# Altium PCB Cube_Connector.PcbDoc
Units mm, origin at the board's own origin, x right, y up, seen from the top; angles counter-clockwise.
Board outline 119.89 x 137.16 mm, 2 copper layers (Top Layer, Bottom Layer); 1 components, 90 nets, 60 pads, 4 vias.
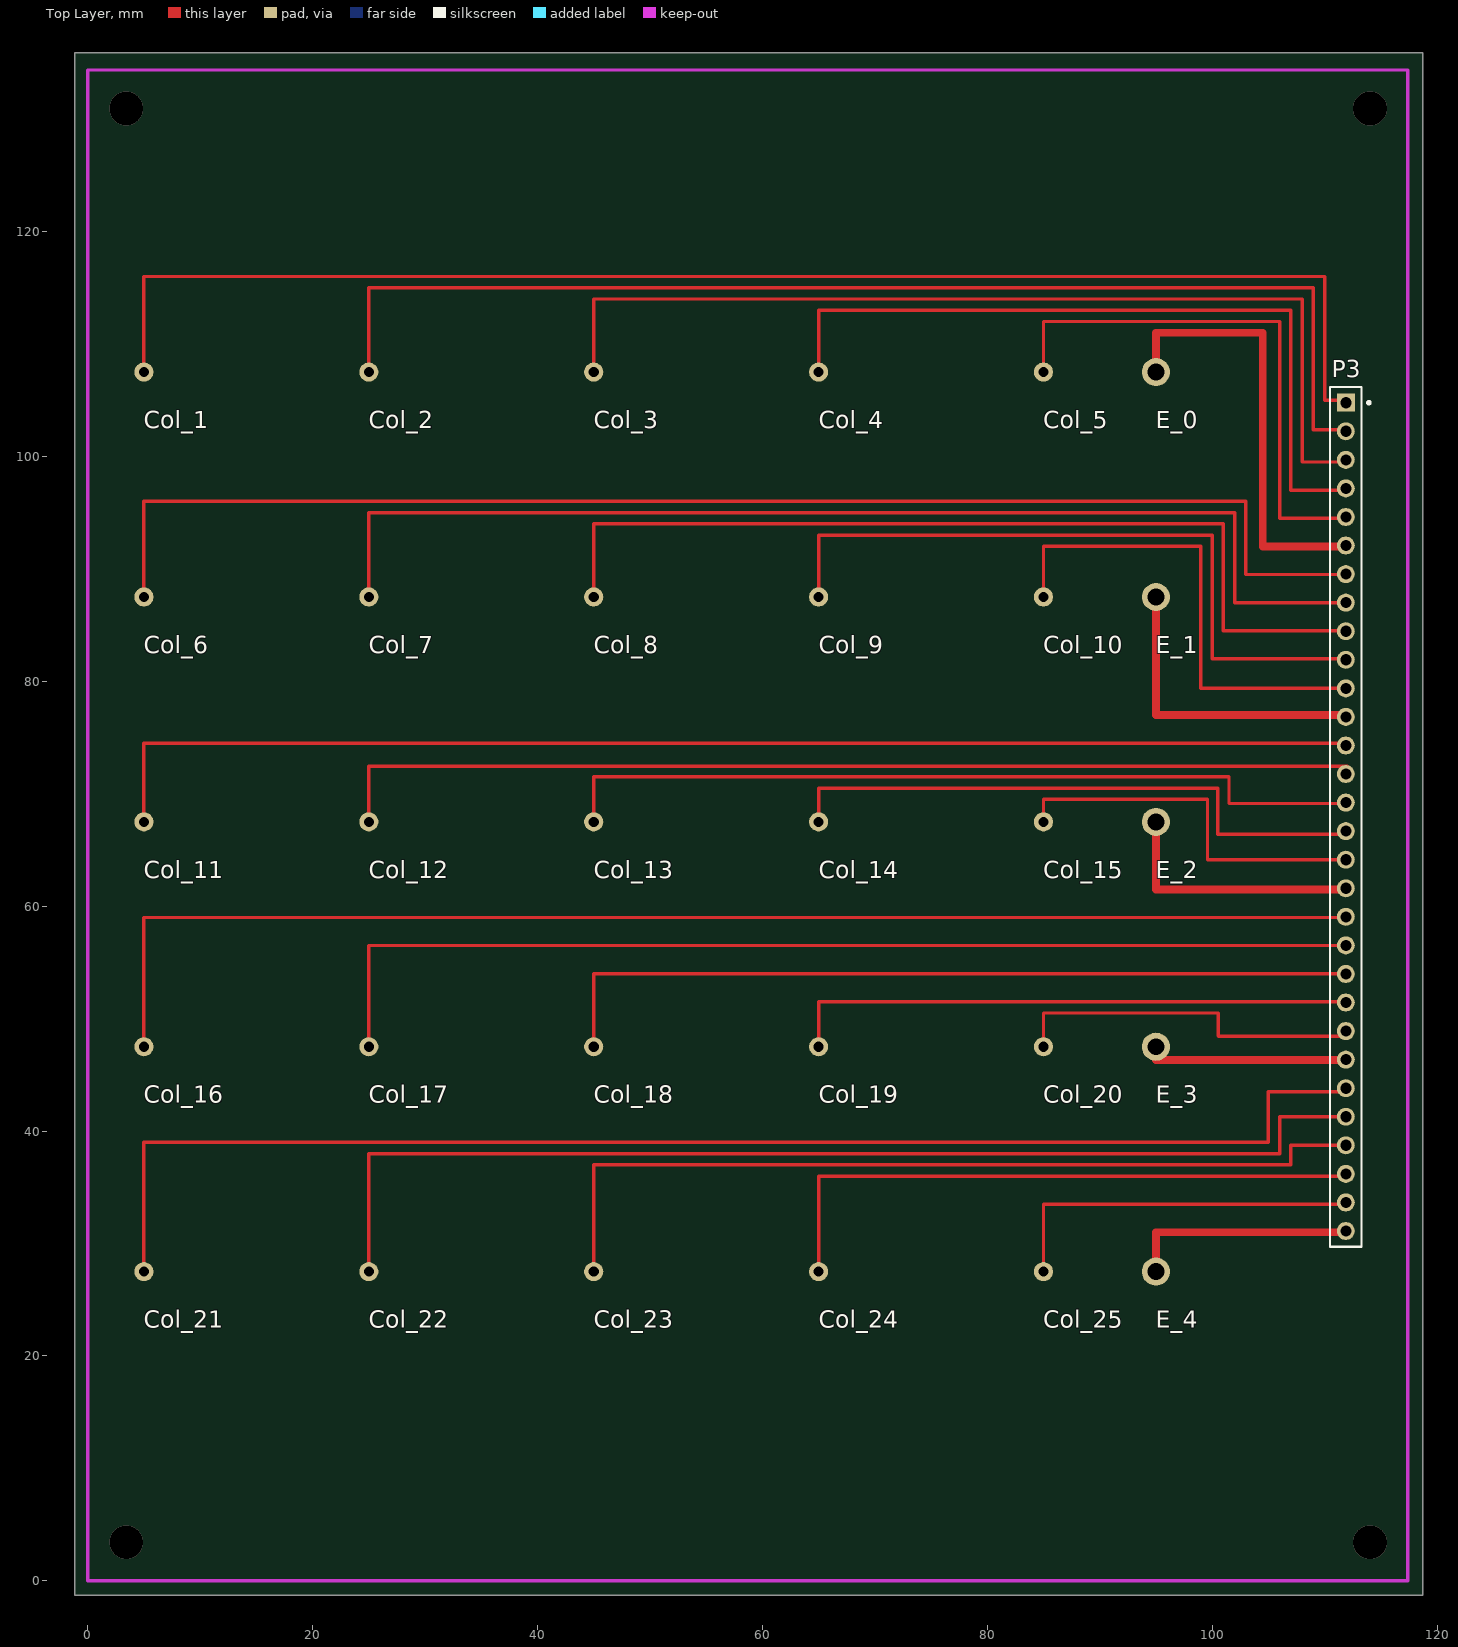
[diagram p0: Top Layer view]
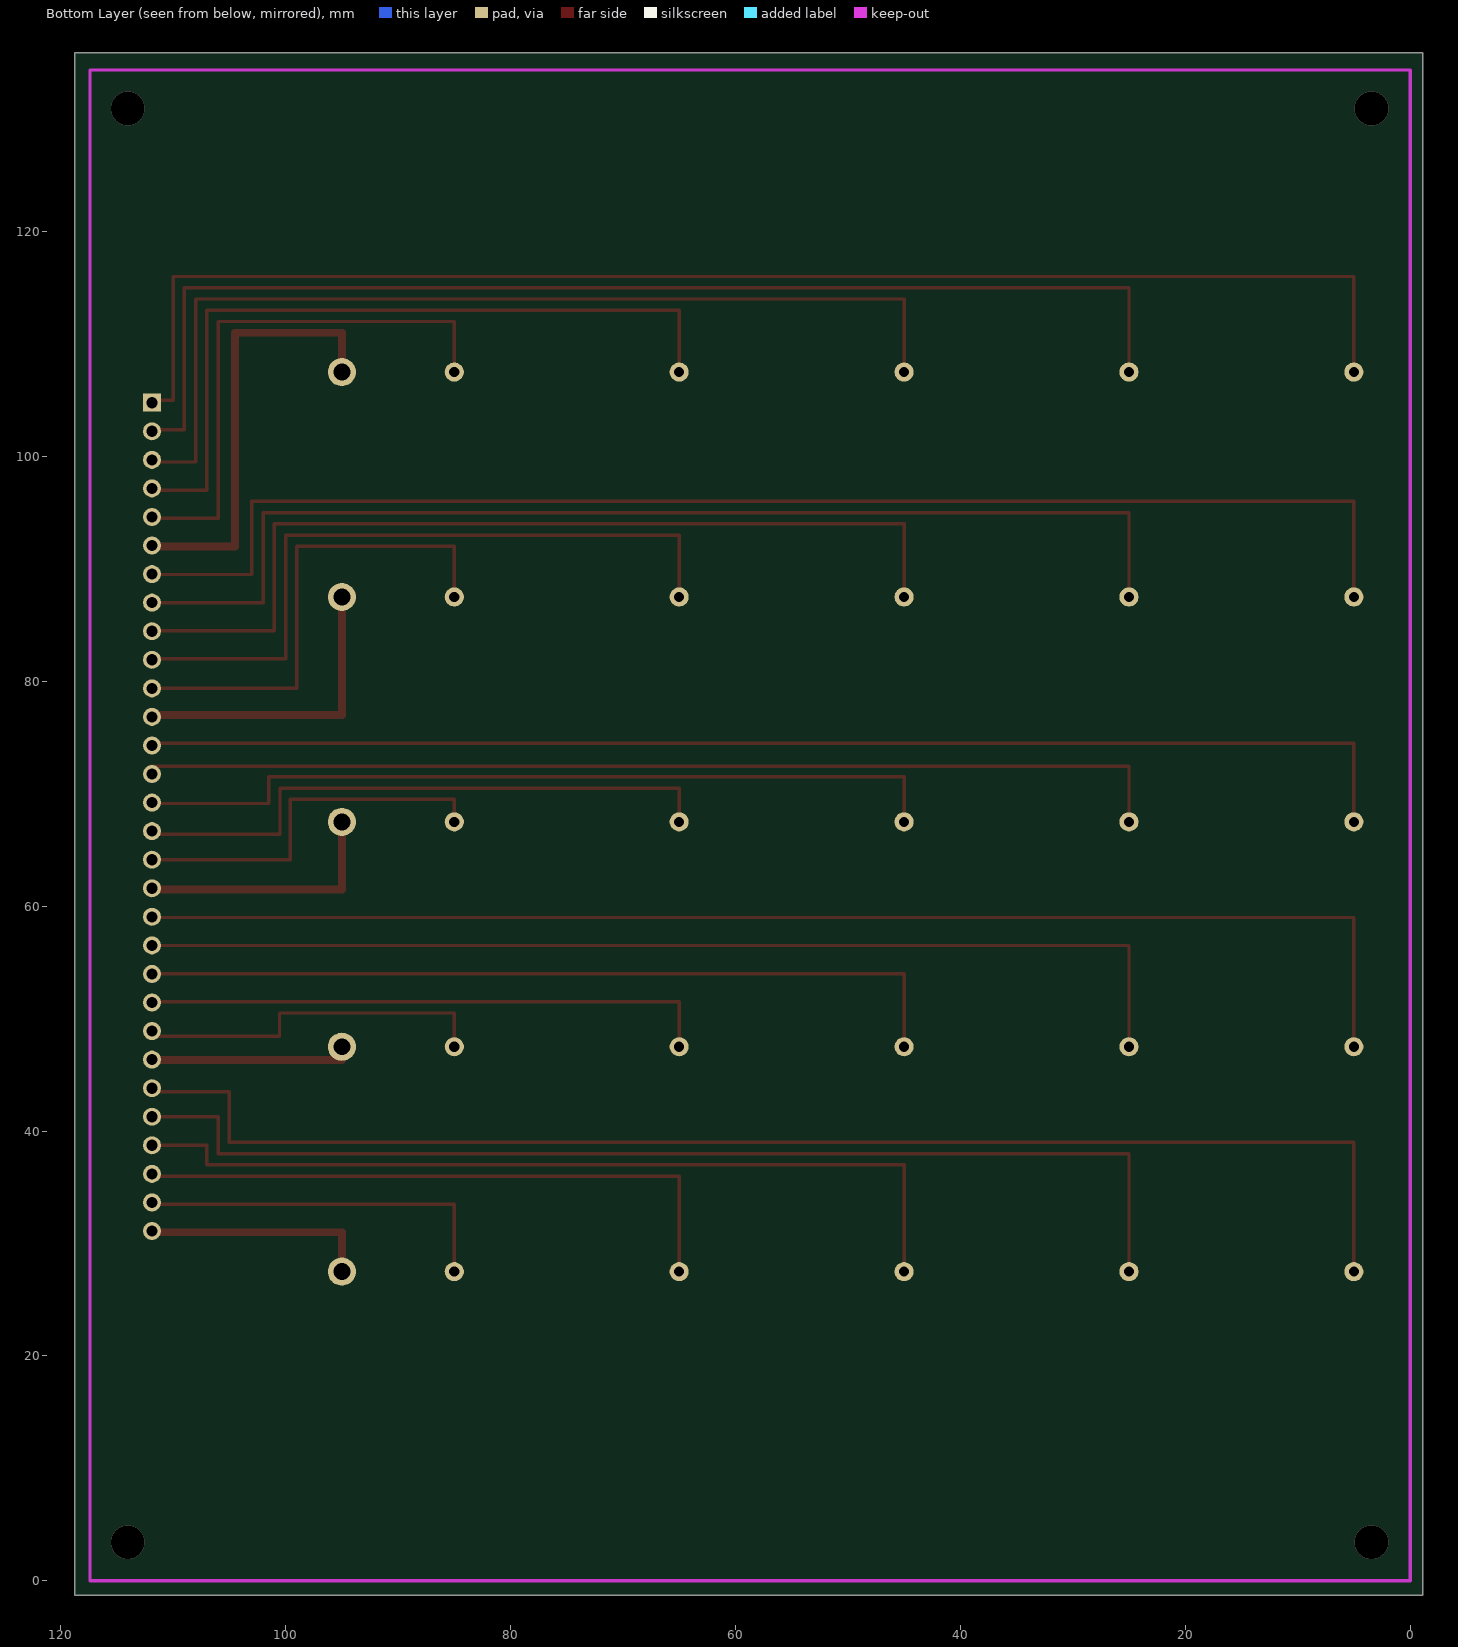
[diagram p1: Bottom Layer view, seen from below]

## Layer stack, top to bottom
Top Layer: signal copper 0.0356
Dielectric: dielectric 0.32, FR-4, Dk 4.8
Bottom Layer: signal copper 0.0356

## Board outline
-1.143,-1.27 -1.143,135.89 118.745,135.89 118.745,-1.27

## Design rules (kind name [scope] priority, off if disabled: settings)
Clearance [All] p1: gap=0.3
PolygonConnect [All] p1: connectstyle=Relief reliefconductorwidth=0.254 reliefentries=4 polygonreliefangle="90 Angle"
RoutingVias [All] p1: holewidth=0.8 width=1.6 viastyle="Through Hole" minholewidth=0.711 minwidth=1.27 maxholewidth=0.711 maxwidth=1.27
SilkscreenOverComponentPads [All] p1: minsilkscreentomaskgap=0.254
SolderMaskExpansion [All] p1: expansion=0.102
Width [All] p1: maxlimit=1.5 minlimit=0.3 preferedwidth=0.3
27 further rules are at their usual default settings.

## Components (designator, comment, footprint, x,y, rotation, side; value= is the part's Value field where it differs from the comment)
P3 "Comment" HDR1X30 111.887,104.775 r270 top

## Footprints (in the part's own frame and the unit in brackets; to place one, negate y for a bottom-side part, rotate by r counter-clockwise, add the part's x,y. Pads: shape width x height; smd on the part's side, far side on the other; paste and mask are expansions set on the pad)
HDR1X30 [mm] "Connector; Header; 30 Position"
  rect 1.6x1.6 hole 0.99: 1(0,0)
  round 1.6 hole 0.99: 2(2.54,0) 3(5.08,0) 4(7.62,0) 5(10.16,0) 6(12.7,0) 7(15.24,0) 8(17.78,0) 9(20.32,0) 10(22.86,0) 11(25.4,0) 12(27.94,0) 13(30.48,0) 14(33.02,0) 15(35.56,0) 16(38.1,0) 17(40.64,0) 18(43.18,0) 19(45.72,0) 20(48.26,0) 21(50.8,0) 22(53.34,0) 23(55.88,0) 24(58.42,0) 25(60.96,0) 26(63.5,0) 27(66.04,0) 28(68.58,0) 29(71.12,0) 30(73.66,0)
  silkscreen extent -1.4,-1.4 75.06,2.18

## Free pads (board coordinates)
  round 1.7 hole 0.9: 1(5,27.5) 1(5,47.5) 1(5,67.5) 1(5,87.5) 1(5,107.5) 1(25,27.5) 1(25,47.5) 1(25,67.5) 1(25,87.5) 1(25,107.5) 1(45,27.5) 1(45,47.5) 1(45,67.5) 1(45,87.5) 1(45,107.5) 1(65,27.5) 1(65,47.5) 1(65,67.5) 1(65,87.5) 1(65,107.5) 1(85,27.5) 1(85,47.5) 1(85,67.5) 1(85,87.5) 1(85,107.5)
  round 2.5 hole 1.5: 6(95,27.5) 6(95,47.5) 6(95,67.5) 6(95,87.5) 6(95,107.5)

## Via types
v1: diameter 3, hole 3, Top Layer to Bottom Layer, 4 vias

## Nets (pads, with @x,y where several pads share a name; then routed paths per layer and width w, separated by ;. In a path a pad name is that pad's centre, name@x,y a point inside that pad or via, vN(x,y) a via of type N, cw(c..) or ccw(c..) an arc to the next point about the centre after c; other vN are vias at no path point)
+5: 
GND: 
NetC1_1: 
NetC3_2: 
NetC4_2: 
NetD1_1: 
NetD2_1: 
NetP1_1: 
NetP1_5: 
NetP1_7: 
NetP1_9: 
NetP2_1: 
NetP2_2: 
NetP2_3: 
NetP2_4: 
NetP2_5: 
NetP2_6: 
NetP2_7: 
NetP2_8: 
NetP2_9: 
NetP2_10: 
NetP2_11: 
NetP2_12: 
NetP2_13: 
NetP2_14: 
NetP2_15: 
NetP2_16: 
NetP2_17: 
NetP2_18: 
NetP2_19: 
NetP2_20: 
NetP2_21: 
NetP2_22: 
NetP2_23: 
NetP2_24: 
NetP2_25: 
NetP2_26: 
NetP2_27: 
NetP2_28: 
NetP2_29: 
NetP2_30: 
NetR2_1: 
NetR3_1: 
NetR4_1: 
NetR5_1: 
NetR6_1: 
NetR7_1: 
NetR8_1: 
NetR9_1: 
NetR10_1: 
NetR11_1: 
NetR12_1: 
NetR13_1: 
NetR14_1: 
NetR15_1: 
NetR16_1: 
NetR17_1: 
NetR18_1: 
NetR19_1: 
NetR20_1: 
NetR21_1: 
NetR22_1: 
NetR23_1: 
NetR24_1: 
NetR25_1: 
NetR26_1: 
NetR28_1: 
NetR28_2: 
NetR29_1: 
NetR29_2: 
NetR30_1: 
NetR30_2: 
NetR31_1: 
NetR31_2: 
NetR32_1: 
NetR32_2: 
NetS2_1: 
NetU1_21: 
NetU1_22: 
NetU1_23: 
NetU1_24: 
NetU1_25: 
NetU1_26: 
NetU1_36: 
NetU1_37: 
NetU1_38: 
NetU1_39: 
NetU1_40: 
VCC: 
VCC_NT: 
pads on no net: P3.1 P3.2 P3.3 P3.4 P3.5 P3.6 P3.7 P3.8 P3.9 P3.10 P3.11 P3.12 P3.13 P3.14 P3.15 P3.16 P3.17 P3.18 P3.19 P3.20 P3.21 P3.22 P3.23 P3.24 P3.25 P3.26 P3.27 P3.28 P3.29 P3.30
copper on no net: | length 2109.8
  Top Layer w0.254: 111.772,31 111.887,31.115
  Top Layer w0.3: 5,27.5 5,35 5,39 105,39 105,40.219 ; 5,47.5 5,52.75 5,59 111.887,59 ; 5,67.5 5,74.5 111.5,74.5 ; 5,87.5 5,96 103,96 103,89.5 112,89.5 ; 5,107.5 5,113.875 5,116 110,116 110,105 112,105 ; 25,27.5 25,34.25 25,38 106,38 106,40.081 106,41.275 111.887,41.275 ; 25,47.5 25,52 25,56.5 111.887,56.5 ; 25,67.5 25,72.45 102.5,72.45 112,72.45 ; 25,87.5 25,95 102,95 102,87 111.887,87 ; 25,107.5 25,115 109,115 109,102.377 111.887,102.377 ; 45,27.5 45,30.5 ; 45,47.5 45,51.25 45,54 106.5,54 111.5,54 111.887,54 ; 45,67.5 45,71.5 101.5,71.5 101.5,69.975 101.5,69.133 111.805,69.133 ; 45,87.5 45,94 101,94 101,84.5 111.887,84.5 ; 45,107.5 45,114 108,114 108,112.5 108,99.5 112,99.5 ; 65,27.5 65,32.75 65,36 108,36 111.692,36 111.887,36.195 ; 65,47.5 65,50.5 65,51.5 111.887,51.5 ; 65,67.5 65,70.5 100.5,70.5 100.5,67.666 100.5,66.388 111.388,66.388 ; 65,87.5 65,93 100,93 100,82 111.887,82 ; 65,107.5 65,113 107,113 107,111.125 107,97 111.887,97 ; 85,27.5 85,32 85,33.5 111.732,33.5 111.887,33.655 ; 85,47.5 85,50.5 99,50.5 100.546,50.5 100.546,48.454 100.562,48.438 111.938,48.438 ; 85,67.5 85,69.5 99.591,69.5 99.591,65.726 99.591,64.135 111.887,64.135 ; 85,87.5 85,92 99,92 99,79.377 111.887,79.377 ; 85,107.5 85,112 106,112 106,109.75 106,94.5 111.887,94.5 ; 105,40 105,43.5 111.5,43.5 112,44 ; 111.887,38.735 107,38.735 107,37.926 107,37 45,37 45,30.5 ; 45,30.5 45,30 45,30.5
  Top Layer w0.7: 95,27.5 95,31 111.772,31 ; 95,47.5 95,46.311 98.5,46.311 111.887,46.311 ; 95,67.5 95,61.5 111.5,61.5 ; 95,87.5 95,77 111.887,77 ; 95,107.5 95,111 104.5,111 104.5,108.75 104.5,92 111.887,92
  other v1: 3.429,3.429 114.046,3.429 3.429,130.937 114.046,130.937

## Keep-outs
Keep-Out Layer:
  lines w0.3: 0,0 117.4,0 117.4,134.366 0,134.366 0,0

## Silkscreen, mask and mechanical layers (free items; w line width, h text height)
Top Overlay:
  text "Col_1" at 5,102.5 h1.52
  text "Col_2" at 25,102.5 h1.52
  text "Col_3" at 45,102.5 h1.52
  text "Col_4" at 65,102.5 h1.52
  text "Col_5" at 85,102.5 h1.52
  text "E_0" at 95,102.5 h1.52
  text "Col_6" at 5,82.5 h1.52
  text "Col_7" at 25,82.5 h1.52
  text "Col_8" at 45,82.5 h1.52
  text "Col_9" at 65,82.5 h1.52
  text "Col_10" at 85,82.5 h1.52
  text "E_1" at 95,82.5 h1.52
  text "Col_11" at 5,62.5 h1.52
  text "Col_12" at 25,62.5 h1.52
  text "Col_13" at 45,62.5 h1.52
  text "Col_14" at 65,62.5 h1.52
  text "Col_15" at 85,62.5 h1.52
  text "E_2" at 95,62.5 h1.52
  text "Col_16" at 5,42.5 h1.52
  text "Col_17" at 25,42.5 h1.52
  text "Col_18" at 45,42.5 h1.52
  text "Col_19" at 65,42.5 h1.52
  text "Col_20" at 85,42.5 h1.52
  text "E_3" at 95,42.5 h1.52
  text "Col_21" at 5,22.5 h1.52
  text "Col_22" at 25,22.5 h1.52
  text "Col_23" at 45,22.5 h1.52
  text "Col_24" at 65,22.5 h1.52
  text "Col_25" at 85,22.5 h1.52
  text "E_4" at 95,22.5 h1.52